# Altium PCB PCB1.PcbDoc
Units mil, origin at the board's own origin, x right, y up, seen from the top; angles counter-clockwise.
Board outline 6000 x 4000 mil, 2 copper layers (Top Layer, Bottom Layer); 13 components, 5 nets, 30 pads, 0 vias.
Unrouted connection lines stored in the file: 25.
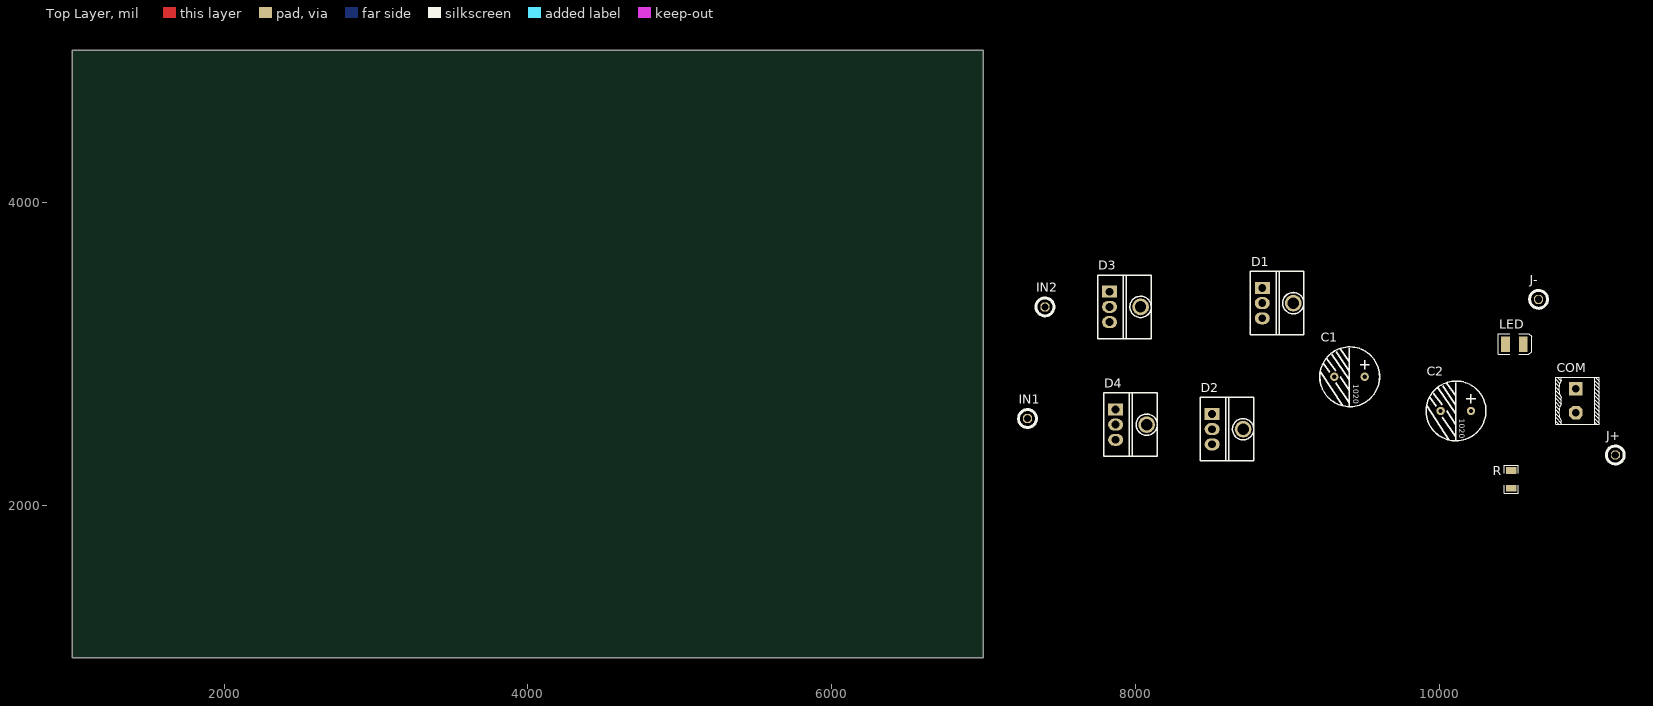
[diagram p0: Top Layer view]
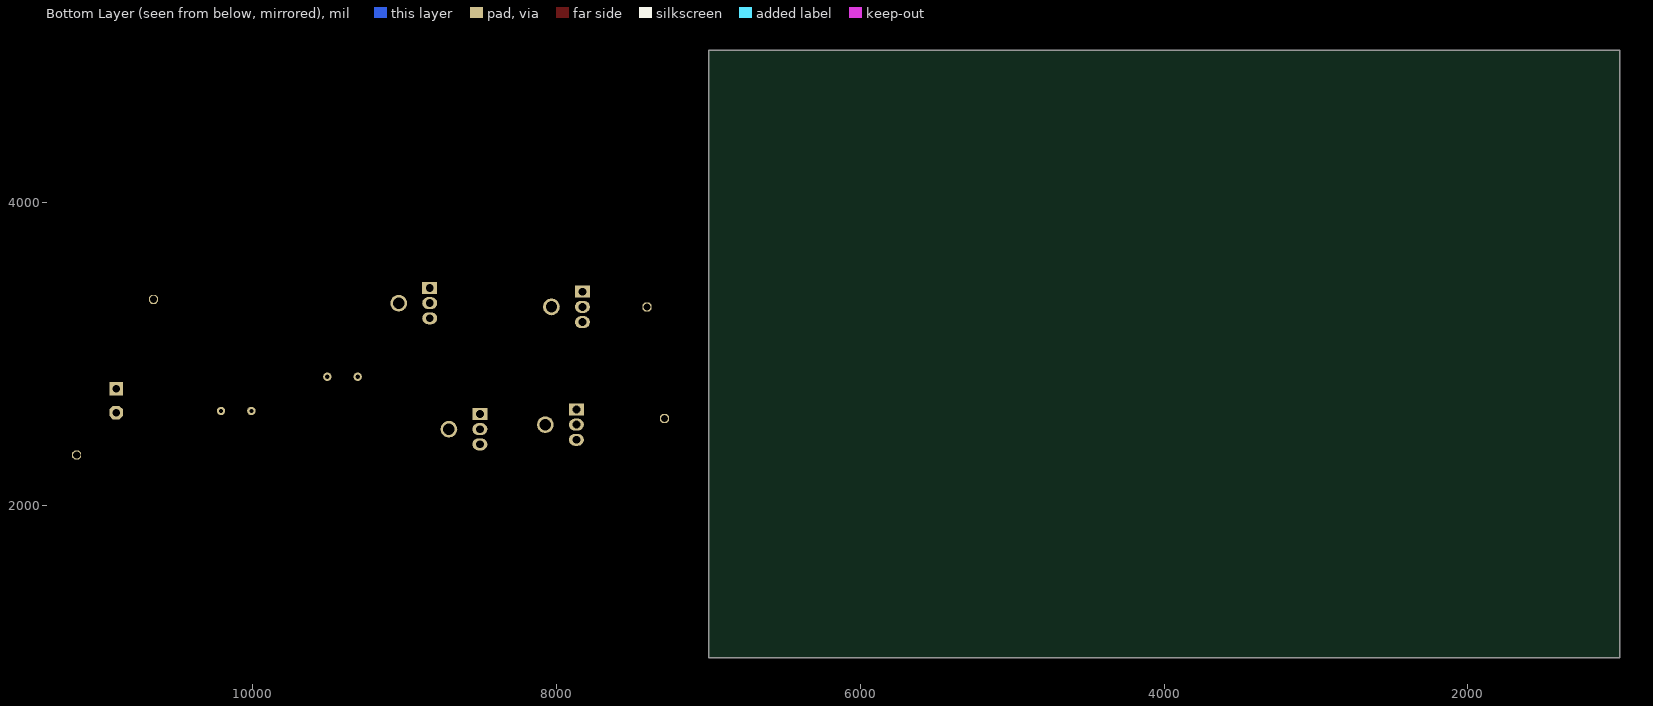
[diagram p1: Bottom Layer view, seen from below]

## Layer stack, top to bottom
Top Solder: solder mask 0.4, Solder Resist, Dk 3.5
Top Layer: signal copper 1.4
Dielectric 1: dielectric 12.6, FR-4, Dk 4.8
Bottom Layer: signal copper 1.4
Bottom Solder: solder mask 0.4, Solder Resist, Dk 3.5

## Board outline
1000,1000 7000,1000 7000,5000 1000,5000

## Design rules (kind name [scope] priority, off if disabled: settings)
Clearance [All] p1: gap=10
PolygonConnect [All] p1: connectstyle=Relief reliefconductorwidth=10 reliefentries=4 polygonreliefangle="90 Angle" airgapwidth=10
RoutingVias [All] p1: holewidth=28 width=50 viastyle="Through Hole" minholewidth=28 minwidth=50 maxholewidth=28 maxwidth=50
SolderMaskExpansion [All] p1: expansion=4
Width [All] p1: maxlimit=10 minlimit=10 preferedwidth=10
30 further rules are at their usual default settings.

## Components (designator, comment, footprint, x,y, rotation, side; value= is the part's Value field where it differs from the comment)
C1 "电解电容" 电解电容直插 9308.98,2850.04 r0 top
C2 "电解电容" 电解电容直插 10008.98,2625.04 r0 top
COM "接线端子（直插）" 接线端子直插 10910,2700 r90 top
D1 "肖特基二极管" TO-220(带散热片) 8840,3341.34 r0 top
D2 "肖特基二极管" TO-220(带散热片) 8509.25,2511.34 r0 top
D3 "肖特基二极管" TO-220(带散热片) 7834.25,3316.34 r0 top
D4 "肖特基二极管" TO-220(带散热片) 7874.25,2541.34 r0 top
IN1 "JET" JET 7290,2575 r0 top
IN2 "JET" JET 7405,3310 r0 top
J+ "JET" JET 11160,2335 r0 top
J- "JET" JET 10655,3360 r0 top
LED "LED_1206" LED_1206 10495,3065 r0 top
R "RES_1206" 1206_R 10475,2175 r90 top

## Footprints (in the part's own frame and the unit in brackets; to place one, negate y for a bottom-side part, rotate by r counter-clockwise, add the part's x,y. Pads: shape width x height; smd on the part's side, far side on the other; paste and mask are expansions set on the pad)
1206_R [mm]
  rect 1.13x1.8 smd: 1(-1.49,0) 2(1.49,0)
  silkscreen extent -2.36,-1.2 2.35,1.2, body extent -1.7,-0.86 1.65,0.87, height 0.85
JET [mm]
  oct 1.5x1.5 hole 1.2: 1(0,0)
  silkscreen extent -1.5,-1.5 1.5,1.5
LED_1206 [mm] "SM LED; 2 C-Bend Leads; Body 3.5 x 2.8 x 1.9 mm, inc leads (LxWxH typ)"
  rect 1.5x2.6 smd: 1(-1.5,0) 2(1.5,0)
  silkscreen extent -2.65,-1.7 2.95,1.7
TO-220(带散热片) [mm]
  rect 2.5x2 hole 1.3: 1(-0.108,2.379)
  oval 2.5x2 hole 1.3: 2(-0.108,-0.161) 3(-0.108,-2.701)
  round 2.794 hole 1.905: 2(5.08,-0.161)
  silkscreen extent -2.11,-5.46 6.86,5.14
接线端子直插 [mil]
  rect 88x88 hole 50: 1(70,9)
  oct 88x88 hole 50: 2(-85.91,9)
  silkscreen extent -164,-145 148,143, body extent -167,-148 151,146, height 559
电解电容直插 [mm] "1000UF/25V\\470UF/16V"
  round 1.4 hole 0.7: 1(5.106,-0.001) 2(0.026,-0.001)
  silkscreen extent -2.4,-5 7.6,5

## Nets (pads, with @x,y where several pads share a name; then routed paths per layer and width w, separated by ;. In a path a pad name is that pad's centre, name@x,y a point inside that pad or via, vN(x,y) a via of type N, cw(c..) or ccw(c..) an arc to the next point about the centre after c; other vN are vias at no path point)
GND: C1.2 C2.2 COM.2 D3.1 D3.3 D4.1 D4.3 J-.1 R.1
NetC1_1: C1.1 C2.1 COM.1 D1.2 D2.2 J+.1 LED.1
NetD1_1: D1.1 D1.3 D3.2 IN2.1
NetD2_1: D2.1 D2.3 D4.2 IN1.1
NetLED_2: LED.2 R.2

## Text inside footprints (layer, text, board x,y; h text height)
C1: Top Overlay "1020" at 9420,2800 h60 r270
C2: Top Overlay "1020" at 10120,2575 h60 r270